# EAGLE board pic_board (EAGLE 6.1)
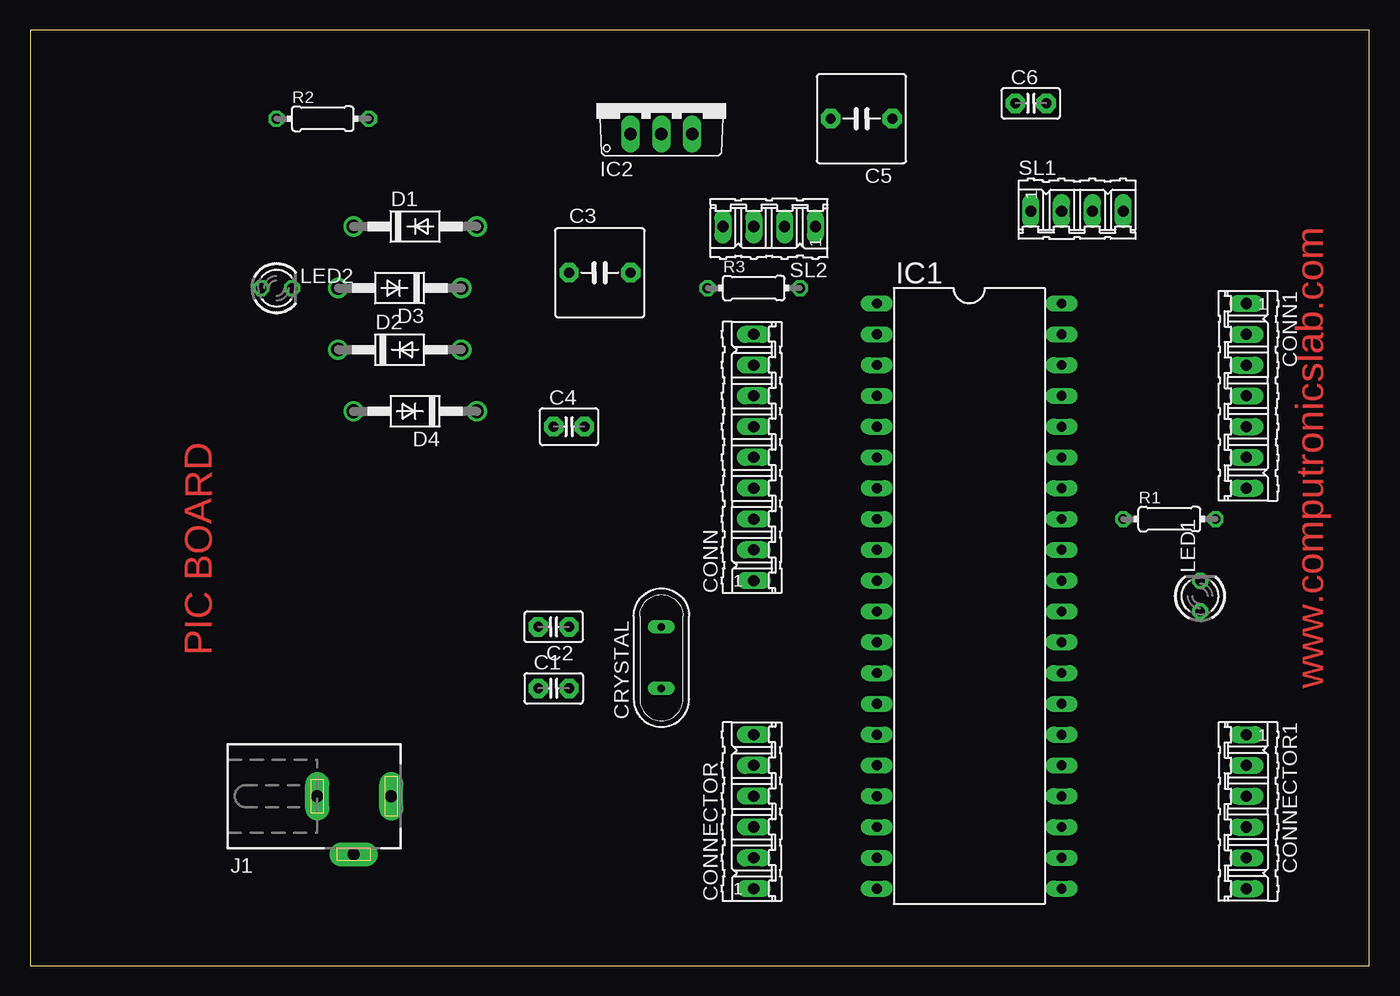
[diagram p0: board, top side]
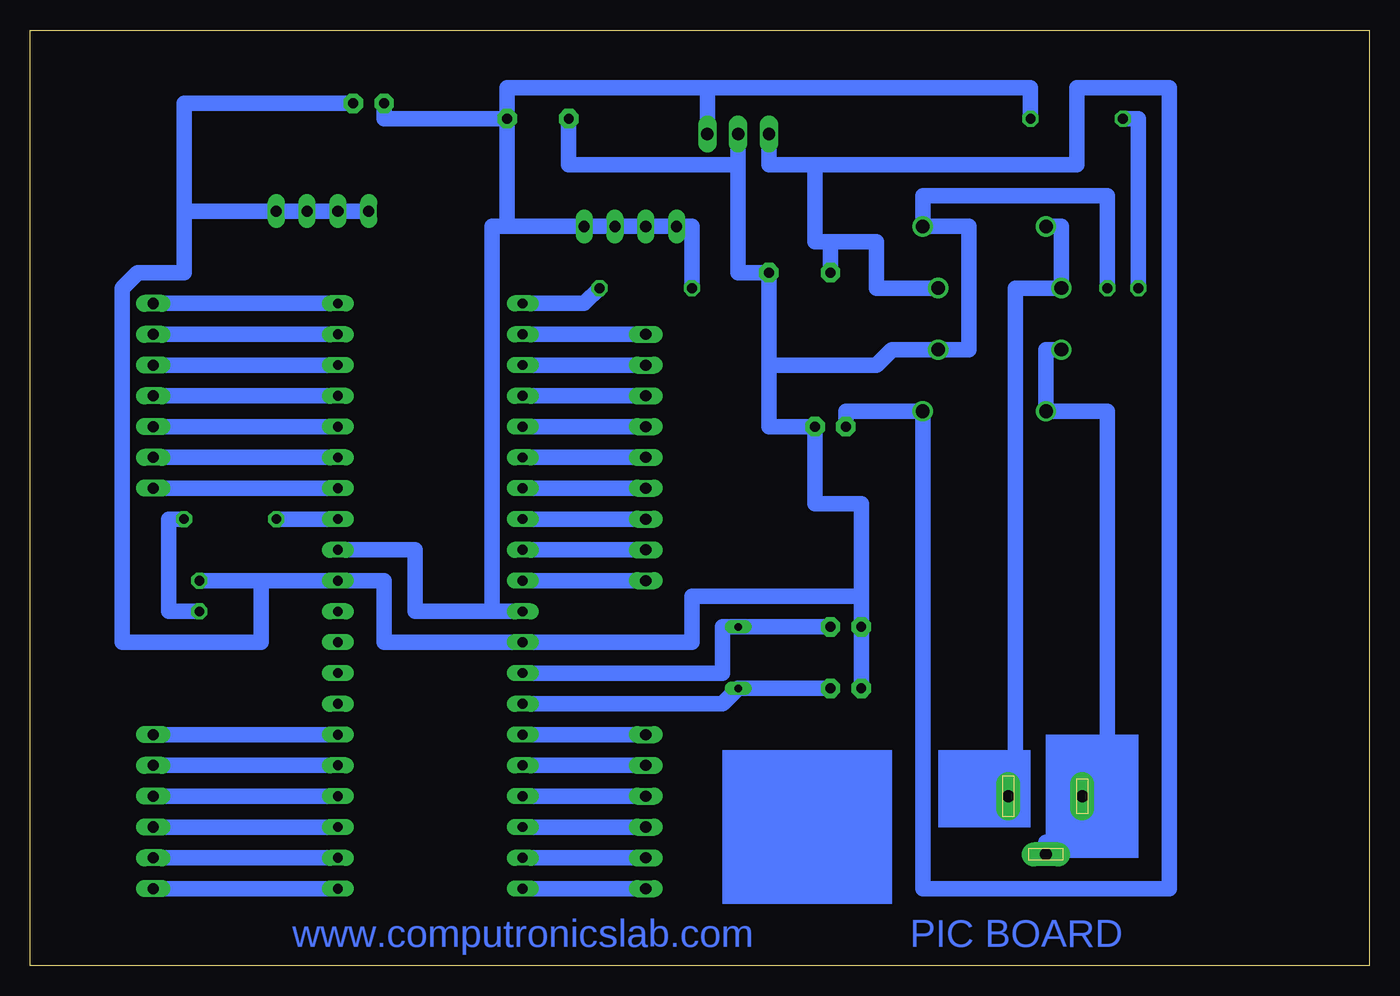
[diagram p1: board, bottom side, seen from below]

Size 110.47 x 77.14 mm. Coordinates in mm from the lower left corner, seen from the top.
Outline: 0,0 110.47,0 110.47,77.14 0,77.14 0,0
Copper layers (1*16): Top 0.035mm / dielectric 1.5mm / Bottom 0.035mm
Design rules: minimum track width 50mil, minimum drill 24mil, track to track 8mil, track to pad 8mil, pad to pad 8mil, via to via 8mil, smd to smd 8mil, copper to edge 40mil, drill to drill 8mil, minimum pad ring 10mil, minimum via ring 8mil, stop-mask expansion 4mil, vias tented up to drill 0mil, thermal gap 10mil

## Footprints (pad centres in the part's own frame; a part is rotated, then mirrored left to right if it is on the bottom)
C2.5-2 = drill 0.813 pad 1.6 octagon: 1 -1.27,0; 2 1.27,0
C5B7.2 = drill 0.813 pad 1.6 octagon: 1 -2.54,0; 2 2.54,0
C2.5-3 = drill 0.813 pad 1.6 octagon: 1 -1.27,0; 2 1.27,0
09P = drill 0.914 long: 1 -10.16,0; 2 -7.62,0; 3 -5.08,0; 4 -2.54,0; 5 0,0; 6 2.54,0; 7 5.08,0; 8 7.62,0; 9 10.16,0
07P = drill 0.914 long: 1 -7.62,0; 2 -5.08,0; 3 -2.54,0; 4 0,0; 5 2.54,0; 6 5.08,0; 7 7.62,0
06P = drill 0.914 long: 1 -6.35,0; 2 -3.81,0; 3 -1.27,0; 4 1.27,0; 5 3.81,0; 6 6.35,0
QS = drill 0.61 long: 1 -2.54,0; 2 2.54,0
DO41-10 = drill 1.118: A 5.08,0; C -5.08,0
DIL40 = drill 0.813 long: 1 -24.13,-7.62; 2 -21.59,-7.62; 3 -19.05,-7.62; 4 -16.51,-7.62; 5 -13.97,-7.62; 6 -11.43,-7.62; 7 -8.89,-7.62; 8 -6.35,-7.62; 9 -3.81,-7.62; 10 -1.27,-7.62; 11 1.27,-7.62; 12 3.81,-7.62; 13 6.35,-7.62; 14 8.89,-7.62; 15 11.43,-7.62; 16 13.97,-7.62; 17 16.51,-7.62; 18 19.05,-7.62; 19 21.59,-7.62; 20 24.13,-7.62; 21 24.13,7.62; 22 21.59,7.62; 23 19.05,7.62; 24 16.51,7.62; 25 13.97,7.62; 26 11.43,7.62; 27 8.89,7.62; 28 6.35,7.62; 29 3.81,7.62; 30 1.27,7.62; 31 -1.27,7.62; 32 -3.81,7.62; 33 -6.35,7.62; 34 -8.89,7.62; 35 -11.43,7.62; 36 -13.97,7.62; 37 -16.51,7.62; 38 -19.05,7.62; 39 -21.59,7.62; 40 -24.13,7.62
TO220V = drill 1.016 long: 1 -2.54,-2.54; 2 0,-2.54; 3 2.54,-2.54
DCJ0303 = drill 1 pad 2 long: 1 0,3.1; 2 4.8,0; 3 0,-3
LED3MM = drill 0.813 octagon: A -1.27,0; K 1.27,0
0204/7 = drill 0.813 octagon: 1 -3.81,0; 2 3.81,0
04P = drill 0.914 long: 1 -3.81,0; 2 -1.27,0; 3 1.27,0; 4 3.81,0

## Placement (x,y rotation side)
C1  22pf  [C2.5-2]  43.18,22.86 0 top
C2  22pf  [C2.5-2]  43.18,27.94 180 top
C3  1000uf  [C5B7.2]  46.99,57.15 0 top
C4  0.1uf  [C2.5-3]  44.45,44.45 0 top
C5  100uf  [C5B7.2]  68.58,69.85 180 top
C6  22pf  [C2.5-2]  82.55,71.12 0 top
CONN  9 pin  [09P]  59.69,41.91 90 top
CONN1  7 pin  [07P]  100.33,46.99 270 top
CONNECTOR  6 pin  [06P]  59.69,12.7 90 top
CONNECTOR1  6 pin  [06P]  100.33,12.7 270 top
CRYSTAL  8MHZ  [QS]  52.07,25.4 90 top
D1  1N4007  [DO41-10]  31.75,60.96 0 top
D2  1N4007  [DO41-10]  30.48,50.8 0 top
D3  1N4007  [DO41-10]  30.48,55.88 180 top
D4  1N4007  [DO41-10]  31.75,45.72 180 top
IC1  PIC16f877a  [DIL40]  77.47,30.48 270 top
IC2  7805TV  [TO220V]  52.07,71.12 0 top
J1  [DCJ0303]  26.67,13.97 270 top
LED1  3mm  [LED3MM]  96.52,30.48 90 top
LED2  3mm  [LED3MM]  20.32,55.88 0 top
R1  220E  [0204/7]  93.98,36.83 0 top
R2  220E  [0204/7]  24.13,69.85 0 top
R3  10K  [0204/7]  59.69,55.88 0 top
SL1  4 pin  [04P]  86.36,62.23 0 top
SL2  4 pin  [04P]  60.96,60.96 180 top

## Library data of the parts
C1-C6 = capacitor-wima
CONN CONN1 CONNECTOR CONNECTOR1 SL1 SL2 = con-amp-quick; OC_FARNELL: unknown; OC_NEWARK: unknown
CRYSTAL = special
D1-D4 = diode
IC1 = microchip; MF: MICROCHIP; MPN: PIC18F4455-I/P; OC_FARNELL: 9321314; OC_NEWARK: 05K2028
IC2 = linear
J1 = con-jack; OC_FARNELL: unknown; OC_NEWARK: unknown
LED1 LED2 = led
R1-R3 = rcl

## Nets
N$1: C2.1 CRYSTAL.2 IC1.13
N$2: C1.2 CRYSTAL.1 IC1.14
N$3: LED1.A R1.2
N$4: CONN.1 IC1.10
N$5: CONN.2 IC1.9
N$6: CONN.3 IC1.8
N$7: CONN.4 IC1.7
N$8: CONN.5 IC1.6
N$9: CONN.6 IC1.5
N$10: CONN.7 IC1.4
N$11: CONN.8 IC1.3
N$12: CONN.9 IC1.2
N$13: CONNECTOR.1 IC1.20
N$14: CONNECTOR.2 IC1.19
N$15: CONNECTOR.3 IC1.18
N$16: CONNECTOR.4 IC1.17
N$17: CONNECTOR.5 IC1.16
N$18: CONNECTOR.6 IC1.15
N$19: CONN1.1 IC1.40
N$20: CONN1.2 IC1.39
N$21: CONN1.3 IC1.38
N$22: CONN1.4 IC1.37
N$23: CONN1.5 IC1.36
N$24: CONN1.6 IC1.35
N$25: CONN1.7 IC1.34
N$26: CONNECTOR1.1 IC1.26
N$27: CONNECTOR1.2 IC1.25
N$28: CONNECTOR1.3 IC1.24
N$29: IC1.33 R1.1
N$30: C3.1 C4.1 D3.C D4.C IC2.1
N$31: D2.C D4.A J1.2 J1.3
N$32: D1.C D3.A J1.1
N$33: C5.1 C6.1 IC1.11 IC1.32 IC2.3 R2.2 R3.1 SL2.1 SL2.2 SL2.3 SL2.4
N$34: LED2.A R2.1
N$35: C1.1 C2.2 C3.2 C4.2 C5.2 C6.2 D1.A D2.A IC1.12 IC1.31 IC2.2 LED1.K LED2.K SL1.1 SL1.2 SL1.3 SL1.4
N$36: CONNECTOR1.4 IC1.23
N$37: CONNECTOR1.5 IC1.22
N$38: CONNECTOR1.6 IC1.21
N$39: IC1.1 R3.2

## Tracks (layer width: path | path; a pad name or v marks a point on that pad's centre or on a via)
N$1
  Bottom 1.27: C2.1 CRYSTAL.2 53.34,27.94 53.34,24.13 IC1.13
N$2
  Bottom 1.27: C1.2 CRYSTAL.1 53.34,21.59 IC1.14
N$3
  Bottom 1.27: LED1.A 99.06,29.21 99.06,36.83 R1.2
N$4
  Bottom 1.27: CONN.1 IC1.10
N$5
  Bottom 1.27: CONN.2 IC1.9
N$6
  Bottom 1.27: CONN.3 IC1.8
N$7
  Bottom 1.27: CONN.4 IC1.7
N$8
  Bottom 1.27: CONN.5 IC1.6
N$9
  Bottom 1.27: CONN.6 IC1.5
N$10
  Bottom 1.27: CONN.7 IC1.4
N$11
  Bottom 1.27: CONN.8 IC1.3
N$12
  Bottom 1.27: CONN.9 IC1.2
N$13
  Bottom 1.27: CONNECTOR.1 IC1.20
N$14
  Bottom 1.27: CONNECTOR.2 IC1.19
N$15
  Bottom 1.27: CONNECTOR.3 IC1.18
N$16
  Bottom 1.27: CONNECTOR.4 IC1.17
N$17
  Bottom 1.27: CONNECTOR.5 IC1.16
N$18
  Bottom 1.27: CONNECTOR.6 IC1.15
N$19
  Bottom 1.27: CONN1.1 IC1.40
N$20
  Bottom 1.27: CONN1.2 IC1.39
N$21
  Bottom 1.27: CONN1.3 IC1.38
N$22
  Bottom 1.27: CONN1.4 IC1.37
N$23
  Bottom 1.27: CONN1.5 IC1.36
N$24
  Bottom 1.27: CONN1.6 IC1.35
N$25
  Bottom 1.27: CONN1.7 IC1.34
N$26
  Bottom 1.27: CONNECTOR1.1 IC1.26
N$27
  Bottom 1.27: CONNECTOR1.2 IC1.25
N$28
  Bottom 1.27: CONNECTOR1.3 IC1.24
N$29
  Bottom 1.27: R1.1 IC1.33
N$30
  Bottom 1.27: C4.1 43.18,45.72 D4.C 36.83,6.35 16.51,6.35 16.51,72.39 24.13,72.39 24.13,66.04 45.72,66.04 | D3.C 40.64,55.88 40.64,59.69 44.45,59.69 | 44.45,59.69 45.72,59.69 45.72,66.04 | 45.72,66.04 49.53,66.04 IC2.1 | 44.45,59.69 C3.1
N$31
  Bottom 1.27: D2.C 26.67,50.8 D4.A 21.59,45.72 21.59,13.97 | 21.59,13.97 21.59,10.16 26.67,10.16 J1.2 | J1.3 21.59,13.97
N$32
  Bottom 1.27: D1.C 25.4,60.96 D3.A 29.21,55.88 29.21,13.97 J1.1
N$33
  Bottom 1.27: 72.39,29.21 78.74,29.21 78.74,34.29 IC1.32 | 72.39,29.21 IC1.11 | R2.2 27.94,72.39 54.61,72.39 | 54.61,72.39 71.12,72.39 C5.1 | 71.12,60.96 72.39,60.96 72.39,29.21 | 71.12,60.96 C5.1 | 54.61,72.39 IC2.3 | C6.1 81.28,69.85 C5.1 | 71.12,60.96 SL2.1 SL2.2 SL2.3 SL2.4 55.88,60.96 R3.1
N$34
  Bottom 1.27: LED2.A 19.05,69.85 R2.1
N$35
  Bottom 1.27: 91.44,31.75 IC1.31 81.28,31.75 81.28,26.67 IC1.12 55.88,26.67 55.88,30.48 41.91,30.48 | 91.44,31.75 LED1.K | 97.79,62.23 97.79,57.15 101.6,57.15 102.87,55.88 102.87,26.67 91.44,26.67 91.44,31.75 | 97.79,62.23 97.79,71.12 C6.2 | 52.07,66.04 52.07,57.15 C3.2 49.53,49.53 | 52.07,66.04 IC2.2 | C5.2 66.04,66.04 52.07,66.04 | LED2.K 21.59,63.5 36.83,63.5 D1.A 33.02,60.96 33.02,50.8 D2.A 39.37,50.8 40.64,49.53 49.53,49.53 | C1.1 C2.2 41.91,30.48 | 49.53,49.53 49.53,44.45 C4.2 45.72,38.1 41.91,38.1 41.91,30.48 | SL1.1 SL1.2 SL1.3 SL1.4 97.79,62.23
N$36
  Bottom 1.27: CONNECTOR1.4 IC1.23
N$37
  Bottom 1.27: CONNECTOR1.5 IC1.22
N$38
  Bottom 1.27: CONNECTOR1.6 IC1.21
N$39
  Bottom 1.27: R3.2 64.77,54.61 IC1.1
(copper drawn outside any net)
  shapes: Bottom area x3

## Text on the board
Top: PIC BOARD | www.computronicslab.com
Bottom: PIC BOARD | www.computronicslab.com